# Altium PCB Memory_card_PCB.PcbDoc
Units mil, origin at the board's own origin, x right, y up, seen from the top; angles counter-clockwise.
Board outline 2755 x 760 mil, 2 copper layers (Top Layer, Bottom Layer); 19 components, 17 nets, 86 pads, 0 vias.
Unrouted connection lines stored in the file: 47.
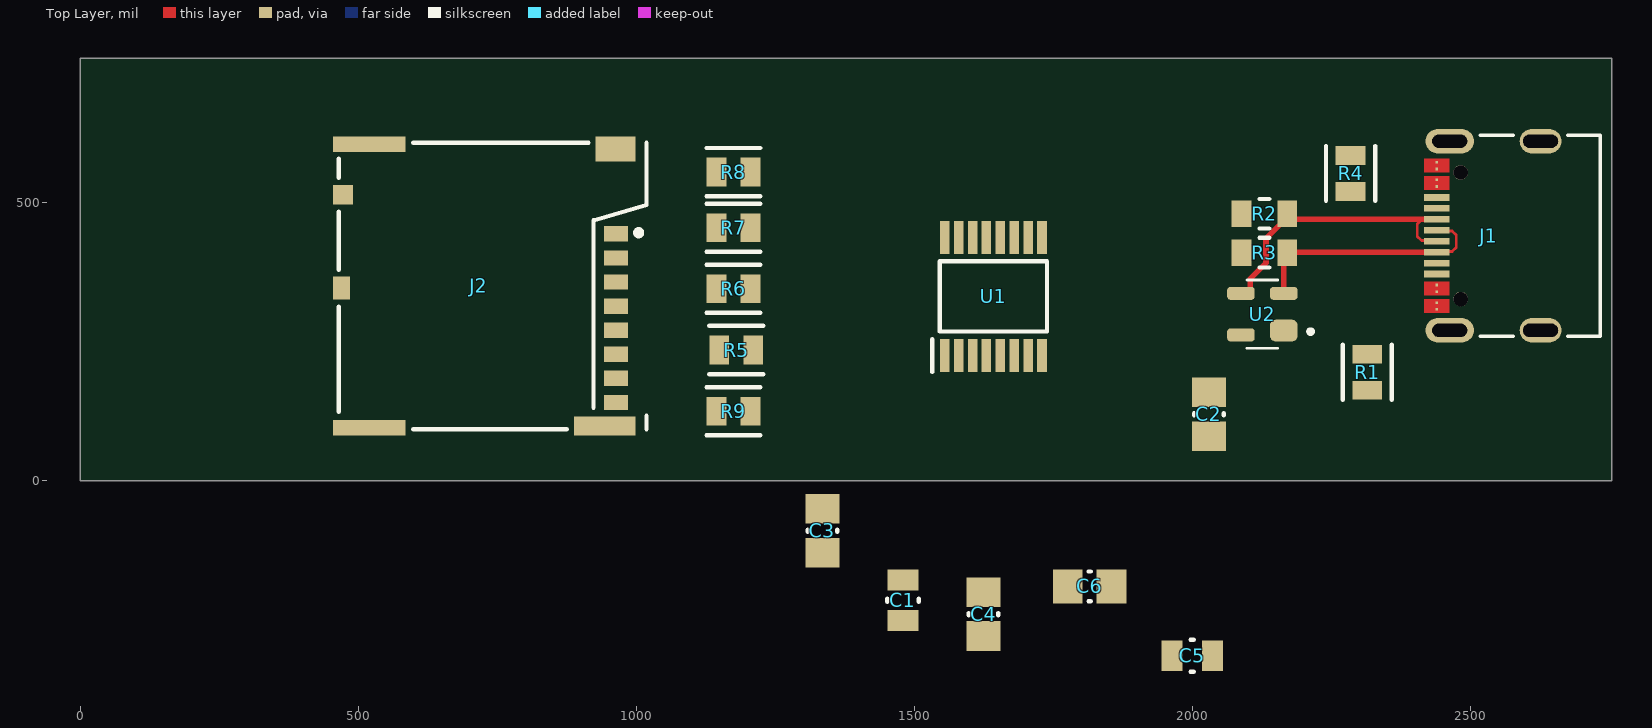
[diagram p0: Top Layer view]
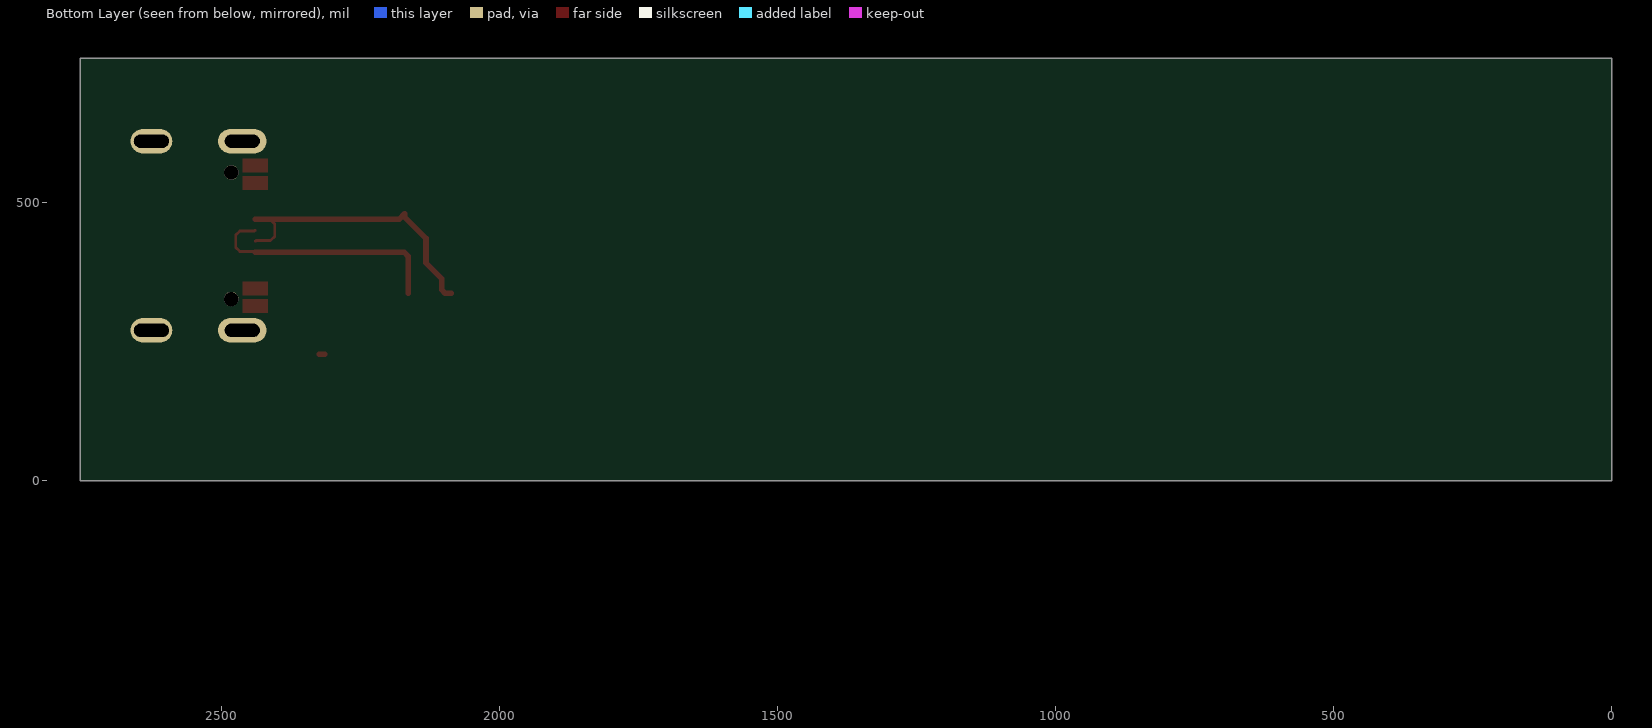
[diagram p1: Bottom Layer view, seen from below]

## Layer stack, top to bottom
Top Solder: solder mask 0.4, Solder Resist, Dk 3.5
Top Layer: signal copper 1.4
Dielectric 1: dielectric 12.6, FR-4, Dk 4.8
Bottom Layer: signal copper 1.4
Bottom Solder: solder mask 0.4, Solder Resist, Dk 3.5

## Board outline
0,0 2755,0 2755,760 0,760

## Design rules (kind name [scope] priority, off if disabled: settings)
Clearance [All] p1: gap=10 ignorepadtopadclearanceinfootprint=TRUE
ComponentClearance [All] p1: gap=19.68 collisioncheckmode=3 verticalgap=10 showdistances=FALSE
DiffPairsRouting [All] p1: maxlimit=10 minlimit=10 mostfreqgap=10 toplayer_minwidth=4 toplayer_maxwidth=15 toplayer_prefwidth=15 bottomlayer_minwidth=4 bottomlayer_maxwidth=15 bottomlayer_prefwidth=15 maxuncoupledlength=500
PolygonConnect [All] p1: connectstyle=Relief reliefconductorwidth=10 reliefentries=4 polygonreliefangle="90 Angle" airgapwidth=10
RoutingVias [All] p1: holewidth=11.81 width=23.62 viastyle="Through Hole" minholewidth=11.81 minwidth=23.62 maxholewidth=11.81 maxwidth=23.62
SolderMaskExpansion [All] p1: expansion=4 istentingtop=FALSE
SupplyNets "Schematic Supply Nets" [InNet('GND')] p1: voltage=0.000
Width [All] p1: maxlimit=10 minlimit=5 preferedwidth=10
28 further rules are at their usual default settings.

## Classes and differential pairs
differential pair NewDifferentialPair1: +D_P -D_N

## Components (designator, comment, footprint, x,y, rotation, side; value= is the part's Value field where it differs from the comment)
C1 "1uF 0805" FP-CC0805-0_85-MFG 1480,-215 r90 top value="1 uF"
C2 "100nF 16V" CAPC0805(2012)145_M 2030,119.37 r270 top value=100nF
C3 "100nF 16V" CAPC0805(2012)145_M 1335,-90 r270 top value=100nF
C4 "100nF 16V" CAPC0805(2012)145_M 1625,-240 r270 top value=100nF
C5 "1uF 0805" FP-CC0805-0_85-MFG 2000,-315 r0 top value="1 uF"
C6 "100nF 16V" CAPC0805(2012)145_M 1815.63,-190 r180 top value=100nF
J1 "USB Type C connector" CONN16_C16PIN_SHN 2584.5,440.46 r90 top
J2 "microSD Memory Card" 5033981892 1018.62,607.99 r270 top
R1 "5R1K" FP-RN73R2A-IPC_C 2315,195 r270 top
R2 "22R" FP-RT0805-MFG 2130,480 r180 top value=22Ω
R3 "22R" FP-RT0805-MFG 2130,410 r180 top value=22Ω
R4 "5R1K" FP-RN73R2A-IPC_C 2285,552.5 r90 top
R5 "10k" FP-CRGP0805-IPC_C 1180,235 r0 top value=10KΩ
R6 "10k" FP-CRGP0805-IPC_C 1175,345 r0 top value=10KΩ
R7 "10k" FP-CRGP0805-IPC_C 1175,455 r0 top value=10KΩ
R8 "10k" FP-CRGP0805-IPC_C 1175,555 r0 top value=10KΩ
R9 "10k" FP-CRGP0805-IPC_C 1175,125 r0 top value=10KΩ
U1 "GL823K" SOP64P600X175-16N 1642.52,331.3 r90 top
U2 "ESD protection diode" SOT190P230X110-4N 2126.42,299.53 r180 top value=1pF

## Footprints (in the part's own frame and the unit in brackets; to place one, negate y for a bottom-side part, rotate by r counter-clockwise, add the part's x,y. Pads: shape width x height; smd on the part's side, far side on the other; paste and mask are expansions set on the pad)
5033981892 [mm]
  rect 0.7x1.1 smd: 1(4.17,-1.4) 2(5.27,-1.4) 3(6.37,-1.4) 4(7.47,-1.4) 5(8.57,-1.4) 6(9.67,-1.4) 7(10.77,-1.4) 8(11.87,-1.4)
  rect 0.9x0.93 smd: 9(2.38,-13.865)
  rect 1.05x0.78 smd: 10(6.645,-13.94)
  rect 0.7x3.33 smd: 11(13.03,-12.665) 14(0.07,-12.665)
  rect 0.86x2.8 smd: 12(12.95,-1.9)
  rect 1.14x1.83 smd: 13(0.29,-1.415)
  silkscreen extent 0,-14.05 13.1,0
CAPC0805(2012)145_M [mm] "Chip Capacitor, Body 2.0x1.2mm, Height 1.45mm, IPC Low Density"
  rect 1.35x1.55 smd: 1(-1,0) 2(1,0)
  silkscreen extent -0.05,-0.67 0.05,0.67, body extent -1.1,-0.72 1.1,0.72, height 1.45
CONN16_C16PIN_SHN [mil]
  round 26 / inner round 60 / far side round 26 hole 26 unplated paste-99999 mask+0: 29(-113.78,101.55) 30(113.78,101.55)
  rect 5x5 smd paste-2.5 mask-2.5: A1(-132.29,144.5) A4(-100.61,144.5) A9(100.61,144.5) A12(132.3,144.5) B1(120.3,144.5) B4(88.61,144.5) B9(-88.61,144.5) B12(-120.29,144.5)
  rect 12x45 smd paste+0 mask+0: A5(-49.22,144.5) A6(-9.85,144.5) A7(9.85,144.5) A8(-68.91,144.5) B5(68.92,144.5) B6(29.54,144.5) B7(-29.53,144.5) B8(49.23,144.5)
  oval 44x87 / inner round 60 / far side oval 44x87 hole 23.62 slot 62.99 at 90 deg paste-99999 mask+0: S1(-170.08,121.23) S2(170.08,121.23)
  oval 44x75 / inner round 60 / far side oval 44x75 hole 23.62 slot 62.99 at 90 deg paste-99999 mask+0: S3(-170.08,-42.15) S4(170.08,-42.15)
  Top Layer region: -106.61,122 -106.61,167 -82.61,167 -82.61,122
  Top Layer region: 82.61,167 106.61,167 106.61,122 82.61,122
  Top Layer region: 114.3,167 138.3,167 138.3,122 114.3,122
  Top Layer region: -114.29,122 -138.29,122 -138.29,167 -114.29,167
  silkscreen extent -181,-150 181,66
FP-CC0805-0_85-MFG [mm]
  rect 0.95x1.4 smd paste+0 mask+0: 1(-0.925,0) 2(0.925,0)
  silkscreen extent -0.08,-0.72 0.08,0.72, body extent -1.6,-1.05 1.6,1.05, height 0.25
FP-CRGP0805-IPC_C [mil]
  rect 35.67x51.57 smd paste+0 mask+0: 1(-30.55,0) 2(30.55,0)
  silkscreen extent -48,-43 48,43, body extent -52,-31 52,31, height 10
FP-RN73R2A-IPC_C [mil]
  rect 33.67x53.39 smd paste+0 mask+0: 1(-32.5,0) 2(32.5,0)
  silkscreen extent -49,-44 49,44, body extent -53,-32 53,32, height 10
FP-RT0805-MFG [mm]
  rect 0.9x1.2 smd paste+0 mask+0: 1(-1.05,0) 2(1.05,0)
  silkscreen extent -0.23,-0.67 0.23,0.67, body extent -1.6,-0.77 1.6,0.77, height 0.25
SOP64P600X175-16N [mm]
  rect 1.5x0.435 smd: 1(-2.7,2.222) 2(-2.7,1.588) 3(-2.7,0.952) 4(-2.7,0.318) 5(-2.7,-0.318) 6(-2.7,-0.952) 7(-2.7,-1.588) 8(-2.7,-2.222) 9(2.7,-2.222) 10(2.7,-1.588) 11(2.7,-0.952) 12(2.7,-0.318) 13(2.7,0.318) 14(2.7,0.952) 15(2.7,1.588) 16(2.7,2.222)
  silkscreen extent -3.45,-2.45 1.6,2.79, body extent -3,-2.45 3,2.45, height 1.75
SOT190P230X110-4N [mm]
  rrect50% 1.26x0.99 smd: 1(-0.98,0.75)
  rrect50% 1.26x0.59 smd: 2(-0.98,-0.95) 3(0.98,-0.95) 4(0.98,0.95)
  silkscreen extent -2.3,-1.56 0.7,1.56, body extent -1.15,-1.45 1.15,1.45, height 1.1

## Part data
C1 C5: library part CMP-03422-000058-1, "CC0805 1 uF X7R 10.00% 16 V", Capacitance="1 uF", Manufacturer=Yageo, Manufacturer Part Number=CC0805KFX7R7BB105, Package=CC0805-0.85, Temperature="-30°C to +85°C", Temperature Characteristic=X7R, Temperature Range High=+85°C, Temperature Range Low=-30°C, Tolerance=0.1, Voltage Rating="16 V", Automotive=No, Category=Cap, ComponentLink2Description=Datasheet, ComponentLink2URL=http://www.yageo.com/documents/recent/UPY-GPHC_Y5V_6.3V-to-50V_8.pdf, Device Class L1="Passive Components", Device Class L2=Capacitors, Device Class L3="Ceramic Capacitors", Footprint Url=http://www.yageo.com/exep/pages/download/literatures/UPY-C_GEN_24.pdf, Height=0.95mm, Ipc Land Pattern Name=CAPC200125X85, Lead Free=Yes, Material=Ceramic, Mouser Description="Multilayer Ceramic Capacitors MLCC - SMD/SMT 1.0uF 16V X7R 10%", Octopart=https://octopart.com/cc0805kfx7r7bb105-yageo-30261725, RoHS=TRUE
C2 C3 C4 C6: library part CMP-1036-04399-1, "CAP 100nF 16V ±5% 0805 (2012 Metric) Thickness 1.45mm SMD", Case-EIA=0805, Case-Metric=2012, Rated Voltage="16 V", Tolerance=Â±5%, Max Thickness="1.45 mm", Technology=SMT
J1: library part "TYPE-C 16PIN 2MD(073) SHOU HAN", "https://jlcpcb.com/partdetail/ShouHan-TYPE_C_16PIN_2MD_073/C2765186?utm_source=chatgpt.com"
J2: library part 503398-1892, "1.10mm Pitch microSD Memory Card Connector, Normal Mount Surface Mount, Push-Push Type, 1.28mm Height", Contact Resistance=100mΩ, Current Rating=500mA, Insulation Resistance=1GΩ, Manufacturer=Molex, Manufacturer Lifecycle Status=ACTIVE, Max Operating Temperature=85°C, Min Operating Temperature=-25°C, Supplier Part Number=8801277, Voltage Rating=10V, Category="Memory Connectors", China RoHS=Compliant, ComponentLink1Description=https://datasheet.octopart.com:443/503398-1892-Molex-datasheet-180775278.pdf?src-supplier=IHS, ComponentLink1URL=https://datasheet.octopart.com:443/503398-1892-Molex-datasheet-180775278.pdf?src-supplier=IHS, ComponentLink2Description=https://datasheet.octopart.com:443/503398-1892-Molex-datasheet-138898078.pdf?src-supplier=Sager+Electronics, ComponentLink2URL=https://datasheet.octopart.com:443/503398-1892-Molex-datasheet-138898078.pdf?src-supplier=Sager+Electronics, ComponentLink3Description=https://datasheet.octopart.com:443/503398-1892-Molex-datasheet-16405786.pdf?src-supplier=Sager+Electronics, ComponentLink3URL=https://datasheet.octopart.com:443/503398-1892-Molex-datasheet-16405786.pdf?src-supplier=Sager+Electronics, ComponentLink4Description=https://sigma.octopart.com:443/138898079/technical_drawing/Molex-503398-1892.pdf?src-supplier=Upverter, ComponentLink4URL=https://sigma.octopart.com:443/138898079/technical_drawing/Molex-503398-1892.pdf?src-supplier=Upverter, ComponentLink5Description=https://sigma.octopart.com:443/16405789/technical_drawing/Molex-503398-1892.pdf?src-supplier=Molex, ComponentLink5URL=https://sigma.octopart.com:443/16405789/technical_drawing/Molex-503398-1892.pdf?src-supplier=Molex, ComponentLink6Description=https://datasheet.octopart.com:443/503398-1892-Molex-datasheet-66628509.pdf?src-supplier=Farnell, ComponentLink6URL=https://datasheet.octopart.com:443/503398-1892-Molex-datasheet-66628509.pdf?src-supplier=Farnell, ComponentLink7Description=https://datasheet.octopart.com:443/503398-1892-Molex-datasheet-10952502.pdf?src-supplier=Newark, ComponentLink7URL=https://datasheet.octopart.com:443/503398-1892-Molex-datasheet-10952502.pdf?src-supplier=Newark, ComponentLink8Description=https://datasheet.octopart.com:443/503398-1892-Molex-datasheet-62087832.pdf?src-supplier=Newark, ComponentLink8URL=https://datasheet.octopart.com:443/503398-1892-Molex-datasheet-62087832.pdf?src-supplier=Newark, ComponentLink9Description=https://datasheet.octopart.com:443/503398-1892-Molex-datasheet-154753182.pdf?src-supplier=Master+Electronics, ComponentLink9URL=https://datasheet.octopart.com:443/503398-1892-Molex-datasheet-154753182.pdf?src-supplier=Master+Electronics, ComponentLink10Description=https://datasheet.octopart.com:443/503398-1892-Molex-datasheet-17852981.pdf?src-supplier=element14+APAC, ComponentLink10URL=https://datasheet.octopart.com:443/503398-1892-Molex-datasheet-17852981.pdf?src-supplier=element14+APAC, ComponentLink11Description=https://datasheet.octopart.com:443/503398-1892-Molex-datasheet-140185767.pdf?src-supplier=RS+(Formerly+Allied+Electronics), ComponentLink11URL=https://datasheet.octopart.com:443/503398-1892-Molex-datasheet-140185767.pdf?src-supplier=RS+(Formerly+Allied+Electronics), ComponentLink12Description=https://datasheet.octopart.com:443/503398-1892-Molex-datasheet-120152253.pdf?src-supplier=RS+(Formerly+Allied+Electronics), ComponentLink12URL=https://datasheet.octopart.com:443/503398-1892-Molex-datasheet-120152253.pdf?src-supplier=RS+(Formerly+Allied+Electronics), ComponentLink13Description=https://datasheet.octopart.com:443/503398-1892-Molex-datasheet-62059324.pdf?src-supplier=RS+(Formerly+Allied+Electronics), ComponentLink13URL=https://datasheet.octopart.com:443/503398-1892-Molex-datasheet-62059324.pdf?src-supplier=RS+(Formerly+Allied+Electronics), ComponentLink14Description=https://datasheet.octopart.com:443/503398-1892-Molex-datasheet-24577251.pdf?src-supplier=TME, ComponentLink14URL=https://datasheet.octopart.com:443/503398-1892-Molex-datasheet-24577251.pdf?src-supplier=TME, ComponentLink15Description=http://sigma.octopart.com:80/16405788/rohs_statement/Molex-503398-1892.pdf?src-supplier=Compliance+Statements, ComponentLink15URL=http://sigma.octopart.com:80/16405788/rohs_statement/Molex-503398-1892.pdf?src-supplier=Compliance+Statements, ComponentLink16Description=http://sigma.octopart.com:80/reach_statement/Molex-company-74.pdf?src-supplier=Compliance+Statements, ComponentLink16URL=http://sigma.octopart.com:80/reach_statement/Molex-company-74.pdf?src-supplier=Compliance+Statements, ComponentLink17Description=http://sigma.octopart.com:80/rohs_statement/Molex-company-73.pdf?src-supplier=Compliance+Statements, ComponentLink17URL=http://sigma.octopart.com:80/rohs_statement/Molex-company-73.pdf?src-supplier=Compliance+Statements, ComponentLink18Description=http://sigma.octopart.com:80/conflict_mineral_statement/Molex-company-72.pdf?src-supplier=Compliance+Statements, ComponentLink18URL=http://sigma.octopart.com:80/conflict_mineral_statement/Molex-company-72.pdf?src-supplier=Compliance+Statements, Connector Type=Connector, Contact Gender=Female, Contact Material="Gold, Tin", Contact Plating=Gold, Country of Origin=VN, Depth=14.05mm, Export Control Classification Number (ECCN) Code=EAR99, Gender=Male, Halogen Free="Low Halogen", Harmonized Tariff Schedule (HTS) Code=8536.69.40.40, Height=1.4mm, Housing Material="Stainless Steel", Introduction Date=2013-02-28, Length=13.6mm, Lifecycle Status=Production, Manufacturer Part Number=503398-1892, Memory Format=FLASH, Mounting Technology="Surface Mount", Number of Circuits=8, Number of Contacts=8, Number of Ports=1, Number of Rows=1, Orientation="Right Angle", Packaging="Cut Tape", Pins=8, Pitch=1.1mm, Plating=Tin, Plating Thickness=508nm, Pricing="1=1.86, 10=1.42, 20=1.39, 50=1.36, 100=1.32 (GBP)", Radiation Hardening=No, REACH SVHC=Yes, RoHS=Compliant, Schedule B="8536695050, 8536695050|8536695050, 8536695050|8536695050|8536695050, 8536695050|8536695050|8536695050|8536695050", Stock=952, Supplier=RS, Terminal Pitch=1.1mm, Termination=Solder, Voltage Rating (AC)=10V, Width=14.05mm
R1 R4: library part CMP-04015-014497-1, "5.1kΩ ±0.05% 0.125W, 1/8W Chip Resistor 0805 (2012 Metric) Moisture Resistant Thin Film"
R2 R3: library part CMP-03412-017128-1, "RES SMD 22 OHM 1% 1/8W 0805", Manufacturer=Yageo, Manufacturer Part Number=RT0805FRD0722RL, Package=RT0805, Power Rating=0.125W, Resistance=22Ω, Temperature="-55°C to +155°C", Temperature Coefficient="25 ppm/°C", Temperature Range High=+155°C, Temperature Range Low=-55°C, Tolerance=0.0001, Voltage Rating=150V, Automotive=No, Category=Res, ComponentLink2Description=Datasheet, ComponentLink2URL=http://www.yageo.com/documents/recent/PYu-RT_1-to-0.01_RoHS_L_9.pdf, Composition="Thin Film", Device Class L1="Passive Components", Device Class L2=Resistors, Device Class L3="Chip SMD Resistors", Digikey Description="RES SMD 22 OHM 1% 1/8W 0805", Footprint Url=http://www.yageo.com/exep/pages/download/literatures/PYu-R_Mount_10.pdf, Height=0.6mm, Ipc Land Pattern Name=RESC200125X50, Lead Free=Yes, Octopart=https://octopart.com/rt0805frd0722rl-yageo-71399874, RoHS=TRUE, Series=RT
R5 R6 R7 R8 R9: library part CMP-03211-006861-1, "CRGP 0805 10K 1% CRGP0805F10K", Ambient Temperature Range High=+70°C, Manufacturer=TE, Manufacturer Part Number=CRGP0805F10K, Package=CRGP0805, Power Rating=0.33W, Resistance=10KΩ, Temperature="-55°C to +155°C", Temperature Coefficient=±100ppm/°C, Temperature Range High=+155°C, Temperature Range Low=-55°C, Tolerance=0.01, Voltage Rating=150V, Automotive=No, Category=Res, ComponentLink2Description=Datasheet, ComponentLink2URL=https://www.mouser.com/datasheet/2/418/NG_DS_9-1773463-9_A-1358566.pdf, Composition="Thick Film", Device Class L1="Passive Components", Device Class L2=Resistors, Device Class L3="Chip SMD Resistors", Digikey Description="CRGP 0805 10K 1%", Height=0.65mm, Ipc Land Pattern Name=RESC200125X55, Lead Free=Yes, Octopart=https://octopart.com/crgp0805f10k-te+connectivity-91018782, RoHS=TRUE, Series=CRGP
U1: library part GL823K-HCY04, "USB 2.0 card reader controller"
U2: library part PRTR5V0U2X,215, "PRTR Series 9 V 1 pF Rail-to-Rail ESD Protection Diode - SOT-143B", Ambient Temperature Range High=85°C, Breakdown Voltage=7.5V, Manufacturer=Nexperia, Manufacturer Lifecycle Status="RELEASED FOR SUPPLY", Max Breakdown Voltage=9V, Min Breakdown Voltage=6V, Min Operating Temperature=-40°C, Operating Supply Voltage=700mV, Peak Reverse Current=100nA, Reverse Standoff Voltage=3V, Supplier Part Number=1727-3884-1-ND, Category="ESD and Circuit Protection ICs", China RoHS=Compliant, ComponentLink1Description=https://datasheet.octopart.com:443/PRTR5V0U2X%2C215-Nexperia-datasheet-180924939.pdf?src-supplier=IHS, ComponentLink2Description=https://datasheet.octopart.com:443/PRTR5V0U2X%2C215-Nexperia-datasheet-5405949.pdf?src-supplier=IHS, ComponentLink2URL=https://datasheet.octopart.com:443/PRTR5V0U2X%2C215-Nexperia-datasheet-5405949.pdf?src-supplier=IHS, ComponentLink3Description=https://datasheet.octopart.com:443/PRTR5V0U2X%2C215-Nexperia-datasheet-137756210.pdf?src-supplier=Newark, ComponentLink3URL=https://datasheet.octopart.com:443/PRTR5V0U2X%2C215-Nexperia-datasheet-137756210.pdf?src-supplier=Newark, ComponentLink4Description=https://sigma.octopart.com:443/138810744/technical_drawing/Nexperia-PRTR5V0U2X%2C215.pdf?src-supplier=Upverter, ComponentLink4URL=https://sigma.octopart.com:443/138810744/technical_drawing/Nexperia-PRTR5V0U2X%2C215.pdf?src-supplier=Upverter, ComponentLink5Description=https://datasheet.octopart.com:443/PRTR5V0U2X%2C215-Nexperia-datasheet-87582154.pdf?src-supplier=Nexperia, ComponentLink5URL=https://datasheet.octopart.com:443/PRTR5V0U2X%2C215-Nexperia-datasheet-87582154.pdf?src-supplier=Nexperia, ComponentLink6Description=https://datasheet.octopart.com:443/PRTR5V0U2X%2C215-NXP-Semiconductors-datasheet-15938047.pdf?src-supplier=iiiC, ComponentLink6URL=https://datasheet.octopart.com:443/PRTR5V0U2X%2C215-NXP-Semiconductors-datasheet-15938047.pdf?src-supplier=iiiC, ComponentLink7Description=http://sigma.octopart.com:80/reach_statement/NXP-Semiconductors-company-13.pdf?src-supplier=Compliance+Statements, ComponentLink7URL=http://sigma.octopart.com:80/reach_statement/NXP-Semiconductors-company-13.pdf?src-supplier=Compliance+Statements, ComponentLink8Description=http://sigma.octopart.com:80/rohs_statement/NXP-Semiconductors-company-12.pdf?src-supplier=Compliance+Statements, ComponentLink8URL=http://sigma.octopart.com:80/rohs_statement/NXP-Semiconductors-company-12.pdf?src-supplier=Compliance+Statements, Contact Plating=Tin, Country of Origin="Mainland China", Direction=Bidirectional, Export Control Classification Number (ECCN) Code=EAR99, Harmonized Tariff Schedule (HTS) Code=8541.10.00.50, Height=1.1mm, Introduction Date=2005-09-23, Lifecycle Status=Production, Manufacturer Part Number=PRTR5V0U2X,215, Max Operating Temperature=85°C, Number of Channels=2, Number of Elements=1, Number of Terminals=4, Pins=4, Polarity=Unidirectional, Pricing="1=0.66, 10=0.41, 100=0.2626, 500=0.19912, 1000=0.17862, 3000=0.15255, 6000=0.13942, 9000=0.13273, 15000=0.1252, 21000=0.12075, 30000=0.11642, 75000=0.11275 (USD)", REACH SVHC=Yes, RoHS=Compliant, Schedule B="8541100080, 8541100080|8541100080|8541100080|8541100080|8541100080|8541100080|8541100080|8541100080|8541100080|8541100080|8541100080|8541100080|8541100080|8541100080|8541100080|8541100080|8541100080|8541100080|8541100080|8541100080|8541100080|8541100080|8541100080|85", Supplier=DigiKey

## Nets (pads, with @x,y where several pads share a name; then routed paths per layer and width w, separated by ;. In a path a pad name is that pad's centre, name@x,y a point inside that pad or via, vN(x,y) a via of type N, cw(c..) or ccw(c..) an arc to the next point about the centre after c; other vN are vias at no path point)
5V_BUS: C1.1 C3.2 J1.A4 J1.A9 J1.B4 J1.B9 U1.10 U2.4
D_N: R3.2 U1.16
D_P: R2.2 U1.15
DAT0: J2.7 R5.1 U1.3
DAT1: J2.8 R9.1 U1.2
DAT2: J2.1 R8.1 U1.7
DAT3: J2.2 R7.1 U1.6
GND: C1.2 C2.1 C3.1 C4.1 C5.2 C6.1 J1.A1 J1.A12 J1.B1 J1.B12 J1.S1 J1.S2 J1.S3 J1.S4 J2.6 R1.2 R4.2 U1.1 U1.14 U2.1
NetJ1_A5: J1.A5 R1.1 | length 9.9
  Top Layer w10: R1.1 R1.1@2324.86,227.5
NetJ1_B5: J1.B5 R4.1
SD_3V3: C5.1 C6.2 J2.4 R5.2 R6.2 R7.2 R8.2 R9.2 U1.8
SDCLK: J2.5 U1.4
SDCMD: J2.3 R6.1 U1.5
USB_D_N: J1.A7 J1.B7 R3.1 U2.2 | length 444.2
  Top Layer w5: J1.B7 2441.19,412.12 2467.68,412.12 2475,419.44 2475,441.8 2467.68,449.12 2441.19,449.12 J1.A7
  Top Layer w10: U2.2 2165,403.66 R3.1 2172.27,410.93 J1.B7
USB_D_P: J1.A6 J1.B6 R2.1 U2.3 | length 527.8
  Top Layer w5: 2412.32,468.81 2405,461.49 2405,439.13 2412.32,431.81 2438.81,431.81 J1.A6
  Top Layer w10: U2.3 2098.2,336.93 2104.76,343.48 2104.76,363.54 2132.88,391.67 2132.88,435.64 2171.34,474.09 R2.1 2181.34,470 J1.B6
VDD: C4.2 U1.9
VDDA: C2.2 U1.13
pads on no net: J1.29 J1.30 J1.A8 J1.B8 J2.9 J2.10 J2.11 J2.12 J2.13 J2.14 U1.11 U1.12